# EAGLE board ControlSystem - v.1.0 (EAGLE 9.5.2)
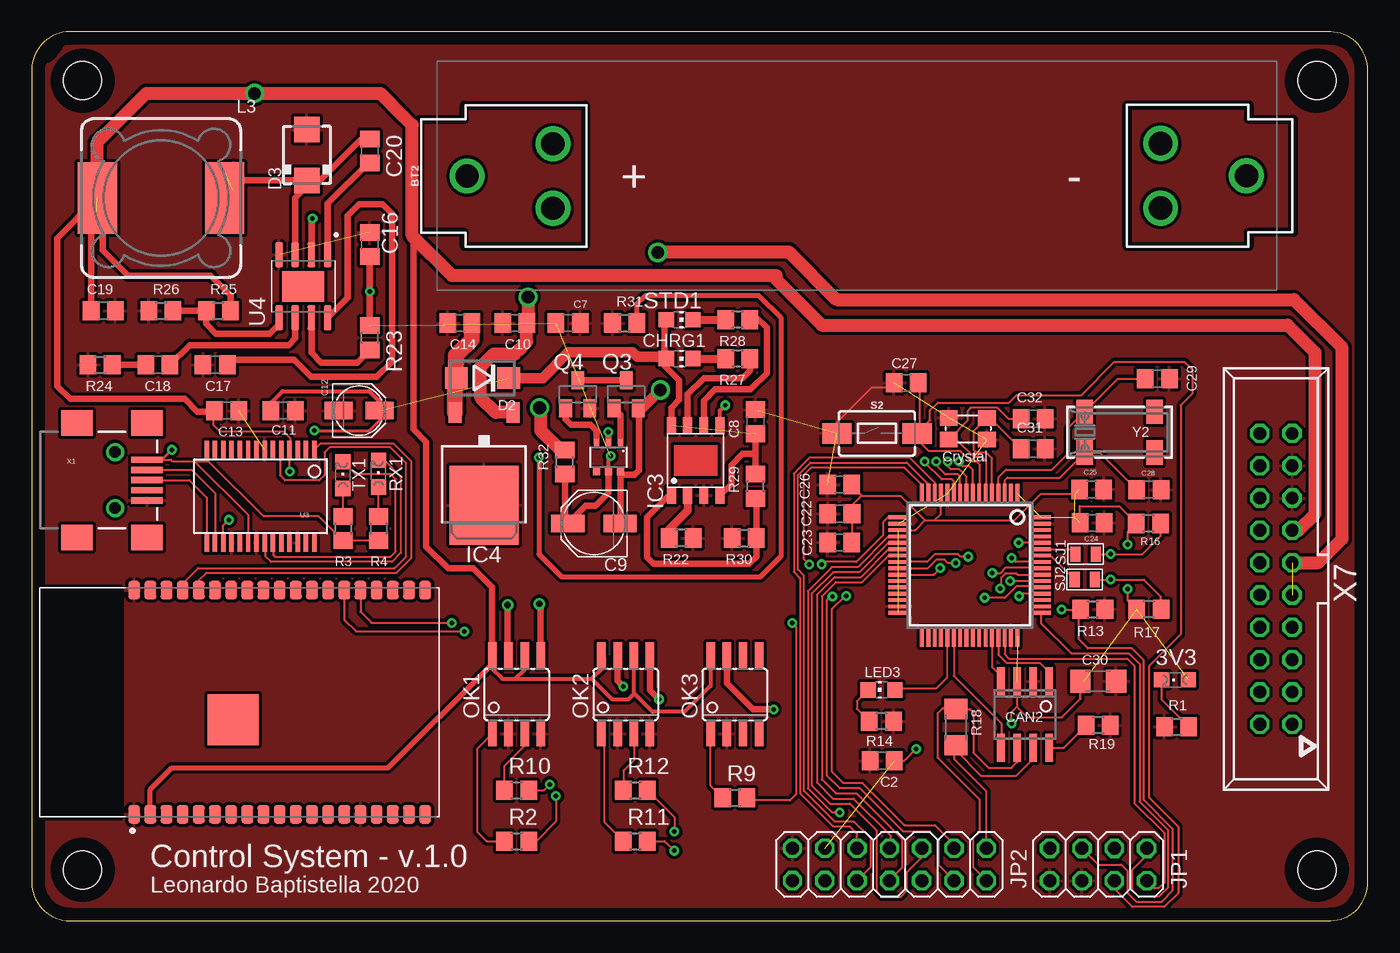
[diagram p0: board, top side]
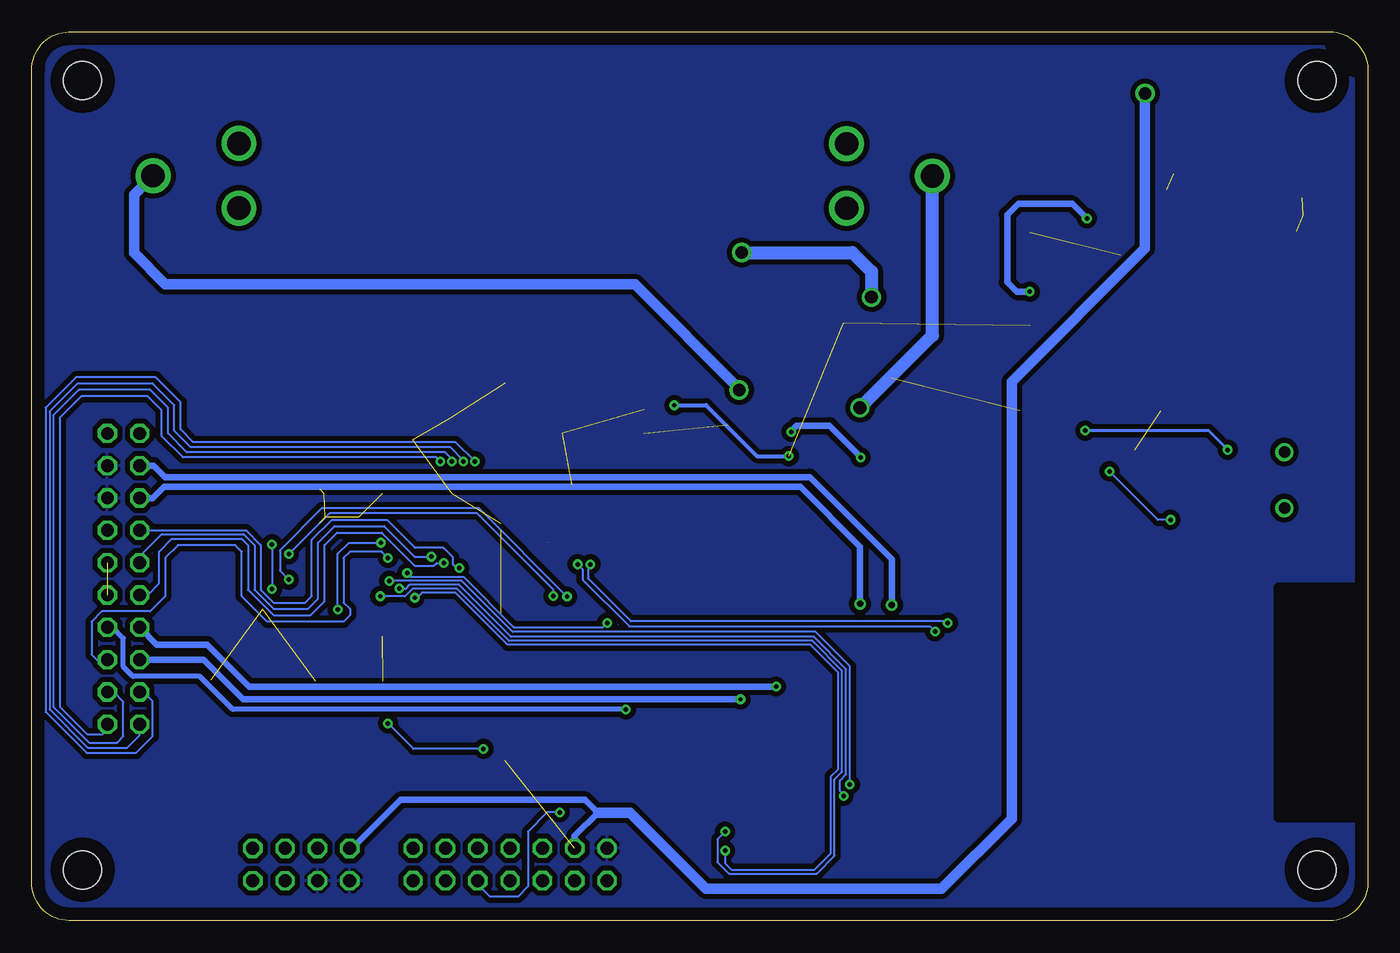
[diagram p1: board, bottom side, seen from below]

Size 105 x 69.84 mm. Coordinates in mm from the lower left corner, seen from the top.
Outline: 0,66.84 0,3 arc90 3,0 102.08,0 arc90 105,3 105,66.84 arc90 102.08,69.84 3,69.84 arc90 0,66.84
Copper layers (1*16): Top 0.035mm / dielectric 1.5mm / Bottom 0.035mm
Design rules "default": minimum track width 6mil, minimum drill 0.35mm, track to track 6mil, track to pad 6mil, pad to pad 6mil, via to via 6mil, smd to smd 6mil, copper to edge 40mil, drill to drill 6mil, minimum pad ring 10mil, minimum via ring 8mil, stop-mask expansion 4mil, vias tented up to drill 0mil, thermal gap 10mil
Net classes: 1 power: width 0.254 mm
Holes 3 mm at 4,66 101,66 4,4 101,4

## Footprints (pad centres in the part's own frame; a part is rotated, then mirrored left to right if it is on the bottom)
CHIPLED_0805 = smd 1.2 x 1.2: A 0,-1.05; C 0,1.05
XCVR_ESP32-WROVER-I = smd 1.45 x 0.93: 1 -8.81,8.26; 2 -8.81,6.99; 3 -8.81,5.72; 4 -8.81,4.45; 5 -8.81,3.18; 6 -8.81,1.91; 7 -8.81,0.64; 8 -8.81,-0.63; 9 -8.81,-1.9; 10 -8.81,-3.17; 11 -8.81,-4.44; 12 -8.81,-5.71; 13 -8.81,-6.98; 14 -8.81,-8.25; 15 -8.81,-9.52; 16 -8.81,-10.79; 17 -8.81,-12.06; 18 -8.81,-13.33; 19 -8.81,-14.6; 20 8.81,-14.6; 21 8.81,-13.33; 22 8.81,-12.06; 23 8.81,-10.79; 24 8.81,-9.52; 25 8.81,-8.25; 26 8.81,-6.98; 27 8.81,-5.71; 28 8.81,-4.44; 29 8.81,-3.17; 30 8.81,-1.9; 31 8.81,-0.63; 32 8.81,0.64; 33 8.81,1.91; 34 8.81,3.18; 35 8.81,4.45; 36 8.81,5.72; 37 8.81,6.99; 38 8.81,8.26 | smd 4 x 4: 39 -1.38,0.47
BATTERY_18650-HOLDER = drill 1.829: GND@1 30.628,0.01; GND@2 23.88,2.55; GND@3 23.88,-2.53; PWR@1 -30.628,-0.01; PWR@2 -23.88,2.53; PWR@3 -23.88,-2.55
C0805 = smd 1.3 x 1.5: 1 -0.95,0; 2 0.95,0
PANASONIC_C = smd 2.6 x 1.4: + 2.05,0; - -2.05,0
PANASONIC_B = smd 2.2 x 1.4: + 1.6,0; - -1.6,0
C1206 = smd 1.6 x 1.8: 1 -1.4,0; 2 1.4,0
SOIC8 = smd 0.6 x 2.2: 1 -1.905,-2.6; 2 -0.635,-2.6; 3 0.635,-2.6; 4 1.905,-2.6; 5 1.905,2.6; 6 0.635,2.6; 7 -0.635,2.6; 8 -1.905,2.6
CHIP-LED0805 = smd 1.2 x 1.2: A 0,-1.05; C 0,1.05
LQFP64_10X10 = smd 0.3 x 1.6: 1 -3.75,-5.6; 2 -3.25,-5.6; 3 -2.75,-5.6; 4 -2.25,-5.6; 5 -1.75,-5.6; 6 -1.25,-5.6; 7 -0.75,-5.6; 8 -0.25,-5.6; 9 0.25,-5.6; 10 0.75,-5.6; 11 1.25,-5.6; 12 1.75,-5.6; 13 2.25,-5.6; 14 2.75,-5.6; 15 3.25,-5.6; 16 3.75,-5.6; 33 3.75,5.6; 34 3.25,5.6; 35 2.75,5.6; 36 2.25,5.6; 37 1.75,5.6; 38 1.25,5.6; 39 0.75,5.6; 40 0.25,5.6; 41 -0.25,5.6; 42 -0.75,5.6; 43 -1.25,5.6; 44 -1.75,5.6; 45 -2.25,5.6; 46 -2.75,5.6; 47 -3.25,5.6; 48 -3.75,5.6 | smd 1.6 x 0.3: 17 5.6,-3.75; 18 5.6,-3.25; 19 5.6,-2.75; 20 5.6,-2.25; 21 5.6,-1.75; 22 5.6,-1.25; 23 5.6,-0.75; 24 5.6,-0.25; 25 5.6,0.25; 26 5.6,0.75; 27 5.6,1.25; 28 5.6,1.75; 29 5.6,2.25; 30 5.6,2.75; 31 5.6,3.25; 32 5.6,3.75; 49 -5.6,3.75; 50 -5.6,3.25; 51 -5.6,2.75; 52 -5.6,2.25; 53 -5.6,1.75; 54 -5.6,1.25; 55 -5.6,0.75; 56 -5.6,0.25; 57 -5.6,-0.25; 58 -5.6,-0.75; 59 -5.6,-1.25; 60 -5.6,-1.75; 61 -5.6,-2.25; 62 -5.6,-2.75; 63 -5.6,-3.25; 64 -5.6,-3.75
DO214BA = smd 1.8 x 1.7: A 2.05,0; C -2.05,0
SMA = smd 2 x 2: A 2,0; C -2,0
SOP-8 = smd 1.3 x 0.7: 1 -2.75,1.905; 2 -2.75,0.635; 3 -2.75,-0.635; 4 -2.75,-1.905; 5 2.75,-1.905; 6 2.75,-0.635; 7 2.75,0.635; 8 2.75,1.905
TO252 = smd 1 x 1.6: 1 -2.28,-4.8; 2 2.28,-4.8 | smd 5.4 x 6.2: 3 0,2.5
2X04 = drill 1.016 octagon: 1 -3.81,-1.27; 2 -3.81,1.27; 3 -1.27,-1.27; 4 -1.27,1.27; 5 1.27,-1.27; 6 1.27,1.27; 7 3.81,-1.27; 8 3.81,1.27
2X07 = drill 1.016 octagon: 1 -7.62,-1.27; 2 -7.62,1.27; 3 -5.08,-1.27; 4 -5.08,1.27; 5 -2.54,-1.27; 6 -2.54,1.27; 7 0,-1.27; 8 0,1.27; 9 2.54,-1.27; 10 2.54,1.27; 11 5.08,-1.27; 12 5.08,1.27; 13 7.62,-1.27; 14 7.62,1.27
SRR1280 = smd 5.6 x 3.1: 1 0.635,5; 2 0.635,-5
SOIC08 = smd 0.66 x 2.032: 1 -1.905,-3.073; 2 -0.635,-3.073; 3 0.635,-3.073; 4 1.905,-3.073; 5 1.905,3.073; 6 0.635,3.073; 7 -0.635,3.073; 8 -1.905,3.073
SOT23 = smd 1 x 1.4: 1 -0.95,-1.1; 2 0.95,-1.1; 3 0,1.1
R0805 = smd 1.3 x 1.5: 1 -0.95,0; 2 0.95,0
R1206 = smd 1.6 x 1.803: 1 -1.422,0; 2 1.422,0
TACTILE_SWITCH_SMD_6.0X3.5MM = smd 2.3 x 1.6: 1 -3.15,0; 2 3.15,0
SMD-JUMPER-2 = smd 0.8 x 1.2: 1 -0.8,0; 2 0.8,0
SSOP28DB = smd 0.348 x 1.397: 1 -4.225,-3.656; 2 -3.575,-3.656; 3 -2.925,-3.656; 4 -2.275,-3.656; 5 -1.625,-3.656; 6 -0.975,-3.656; 7 -0.325,-3.656; 8 0.325,-3.656; 9 0.975,-3.656; 10 1.625,-3.656; 11 2.275,-3.656; 12 2.925,-3.656; 13 3.575,-3.656; 14 4.225,-3.656; 15 4.225,3.656; 16 3.575,3.656; 17 2.925,3.656; 18 2.275,3.656; 19 1.625,3.656; 20 0.975,3.656; 21 0.325,3.656; 22 -0.325,3.656; 23 -0.975,3.656; 24 -1.625,3.656; 25 -2.275,3.656; 26 -2.925,3.656; 27 -3.575,3.656; 28 -4.225,3.656
SOIC127P600X170-9N = smd 1.97 x 0.6: 1 -2.475,1.905; 2 -2.475,0.635; 3 -2.475,-0.635; 4 -2.475,-1.905; 5 2.475,-1.905; 6 2.475,-0.635; 7 2.475,0.635; 8 2.475,1.905 | smd 2.41 x 3.3: 9 0,0
CRYSTAL_SMD = smd 1.4 x 1.2: P$1 0,1.7; P$2 3,1.7; P$3 0,0; P$4 3,0
SOT23-6 = smd 0.4 x 0.55: 1 -0.95,-1.15; 2 0,-1.15; 3 0.95,-1.15 | smd 0.55 x 0.55: 4 0.95,1.15; 5 0,1.15; 6 -0.95,1.15
USB-MINIB-NOSTOP = smd 2.5 x 0.5: D+ 2.5,0; D- 2.5,0.8; GND 2.5,-1.6; ID 2.5,-0.8; VBUS 2.5,1.6 | smd 2.5 x 2: G1 -3,-4.5; G2 -3,4.5; G3 2.5,4.5; G4 2.5,-4.5 | drill 0.9 pad 0.8: H1 0,2.2 | drill 0.9 pad 0.787: H2 0,-2.2
057-020-1 = drill 1 octagon: 1 -11.43,-1.27; 2 -11.43,1.27; 3 -8.89,-1.27; 4 -8.89,1.27; 5 -6.35,-1.27; 6 -6.35,1.27; 7 -3.81,-1.27; 8 -3.81,1.27; 9 -1.27,-1.27; 10 -1.27,1.27; 11 1.27,-1.27; 12 1.27,1.27; 13 3.81,-1.27; 14 3.81,1.27; 15 6.35,-1.27; 16 6.35,1.27; 17 8.89,-1.27; 18 8.89,1.27; 19 11.43,-1.27; 20 11.43,1.27
CRYSTAL_8X3.8 = smd 1.3 x 1.9: P$1 -2.75,-1.6; P$2 2.75,-1.6; P$3 2.75,1.6; P$4 -2.75,1.6

## Placement (x,y rotation side)
3V3  [CHIPLED_0805]  89.85,18.92 90 top
A1  ESP32-WROVER-I  [XCVR_ESP32-WROVER-I]  16.31,17.17 90 top
BT2  [BATTERY_18650-HOLDER]  64.84,58.52 0 top
C2  [C0805]  66.83,12.57 180 top
C7  10uf  [C0805]  42.15,46.96 0 top
C8  10uF  [C0805]  56.88,39.21 90 top
C9  0.1uF  [PANASONIC_C]  44.18,31.21 180 top
C10  10uF  [C0805]  37.96,46.96 180 top
C11  0.1uF  [C0805]  19.76,40.08 0 top
C12  10uF  [PANASONIC_B]  25.73,40.08 0 top
C13  0.1uF  [C0805]  15.31,40.08 0 top
C14  10uF  [C0805]  33.64,46.96 180 top
C16  10uF  [C0805]  26.57,53.14 90 top
C17  0.1uF  [C0805]  14.41,43.68 180 top
C18  3.9nF  [C0805]  9.9,43.68 180 top
C19  22uF  [C0805]  5.62,47.93 0 top
C20  10nF  [C0805]  26.57,60.48 270 top
C22  [C0805]  63.51,31.98 180 top
C23  [C0805]  63.51,29.72 180 top
C24  [C0805]  83.34,31.25 0 top
C25  [C0805]  83.3,33.88 0 top
C26  [C0805]  63.5,34.27 180 top
C27  [C0805]  68.72,42.25 0 top
C28  [C0805]  87.8,33.88 180 top
C29  [C0805]  88.47,42.58 180 top
C30  1nF  [C1206]  83.82,18.82 0 top
C31  [C0805]  78.69,37.07 0 top
C32  [C0805]  78.69,39.45 0 top
CAN2  SN65HVD233D  [SOIC8]  78.07,16.2 180 top
CHRG1  [CHIP-LED0805]  50.91,44.16 270 top
COMM_MICRO1  STM32L496RGT6  [LQFP64_10X10]  73.72,27.94 180 top
D2  [DO214BA]  35.42,42.64 180 top
D3  B130-13-F  [SMA]  21.62,60.16 90 top
IC3  TP4056  [SOP-8]  52.18,36.16 90 top
IC4  7806DT  [TO252]  35.54,35.13 180 top
JP1  [2X04]  83.82,4.41 180 top
JP2  [2X07]  67.41,4.42 180 top
L3  SRR1280  [SRR1280]  10.16,57.42 270 top
LED3  [CHIP-LED0805]  66.79,18.13 90 top
OK1  ILD205  [SOIC08]  38.1,17.78 0 top
OK2  ILD205  [SOIC08]  46.68,17.78 0 top
OK3  ILD205  [SOIC08]  55.26,17.78 0 top
Q3  SSM3K329R  [SOT23]  46.72,41.37 0 top
Q4  SSM3K329R  [SOT23]  42.91,41.37 0 top
R1  220  [R0805]  89.98,15.24 0 top
R2  1K  [R0805]  38.1,6.25 0 top
R3  1K  [R0805]  24.46,30.81 270 top
R4  1K  [R0805]  27.25,30.81 270 top
R9  1K  [R0805]  55.26,9.66 0 top
R10  1K  [R0805]  38.1,10.26 0 top
R11  1K  [R0805]  47.44,6.25 0 top
R12  1K  [R0805]  47.44,10.26 0 top
R13  [R0805]  83.39,24.46 0 top
R14  [R0805]  66.78,15.66 180 top
R16  [R0805]  87.75,31.21 180 top
R17  [R0805]  87.8,24.46 180 top
R18  120  [R1206]  72.62,15.21 90 top
R19  100  [R0805]  83.82,15.35 180 top
R22  [R0805]  51.04,30.07 180 top
R23  100K  [R0805]  26.57,45.8 90 top
R24  6.8K  [R0805]  5.37,43.68 0 top
R25  26.1K  [R0805]  14.66,47.93 0 top
R26  10K  [R0805]  10.15,47.93 0 top
R27  1k  [R0805]  55.48,44.16 180 top
R28  1k  [R0805]  55.48,47.21 180 top
R29  [R0805]  56.88,34.13 90 top
R30  [R0805]  55.99,30.07 0 top
R31  1k  [R0805]  46.59,46.96 0 top
R32  100  [R0805]  41.89,36.04 90 top
RX1  Green  [CHIPLED_0805]  27.25,35.13 0 top
S2  MOMENTARY-SWITCH-SPST-SMD-6.0X3.5MM  [TACTILE_SWITCH_SMD_6.0X3.5MM]  66.43,38.29 0 top
SJ1  [SMD-JUMPER-2]  82.83,28.8 0 top
SJ2  [SMD-JUMPER-2]  82.76,26.8 0 top
STD1  [CHIP-LED0805]  50.91,47.21 270 top
TX1  Red  [CHIPLED_0805]  24.46,35 0 top
U3  FT232RLSSOP  [SSOP28DB]  17.98,33.35 180 top
U4  MP2307DN-LF-Z  [SOIC127P600X170-9N]  21.34,49.84 270 top
U$2  CRYSTAL  [CRYSTAL_SMD]  72.07,37.8 0 top
U$3  DW01  [SOT23-6]  45.32,36.42 180 top
X1  USB-SMD-NS  [USB-MINIB-NOSTOP]  6.55,34.62 0 top
X7  057-020-1  [057-020-1]  97.79,26.86 90 top
Y2  [CRYSTAL_8X3.8]  85.5,38.38 0 top

## Library data of the parts
3V3 CHRG1 LED3 RX1 STD1 TX1 = led
A1 = ESP32-WROVER-I; AVAILABILITY: Unavailable; DESCRIPTION: Bluetooth, WiFi 802.11b/g/n, Bluetooth v4.2 +EDR, Class 1, 2 and 3 Transceiver Module 2.4GHz ~ 2.5GHz Antenna Not Included, I-PEX Surface Mount; MF: Espressif Systems; MP: ESP32-WROVER-I; PACKAGE: Module Espressif Systems; PRICE: None
BT2 = SparkFun-Batteries; PROD_ID: BATT-12327; SF_SKU: PRT-13113
C2 C7-C14 C16-C20 C22-C32 = rcl; SPICEPREFIX: C
CAN2 = SN65HVD233D; AVAILABILITY: Unavailable; DESCRIPTION: 3.3V CAN Transceiver with Standby Mode, Loop-back 8-SOIC -40 to 125; MF: Texas Instruments; MP: SN65HVD233D; PACKAGE: SOIC-8 Texas Instruments; PRICE: None
COMM_MICRO1 = STM32L4xxx; FARNELL: 2725138; FLASH: 1024kB; SRAM: 320kB
D2 = diode
D3 = B130-13-F; AVAILABILITY: Unavailable; DESCRIPTION: Diode Schottky 30V 1A Surface Mount SMA; MF: Multicomp; MP: B130-13-F; PACKAGE: DO-214 Multicomp; PRICE: None
IC3 = TP4056
IC4 = linear
JP1 JP2 = pinhead
L3 = inductor-bourns
OK1-OK3 = optocoupler; MF: VISHAY/TELEFUNKEN; MPN: ILD205T; OC_FARNELL: 1469512; OC_NEWARK: 20H8678
Q3 Q4 = SSM3K329R; AVAILABILITY: Unavailable; DESCRIPTION: N-Channel 60V 115mA (Tc) 225mW (Ta) Surface Mount SOT-23-3 (TO-236); MF: STMicroelectronics; MP: 2N7002; PACKAGE: SOT-23-3 Vishay; PRICE: None
R1-R4 R9-R14 R16-R19 R22-R32 = rcl; SPICEPREFIX: R
S2 = SparkFun-Switches; PROD_ID: SWCH-00815; SF_SKU: COM-08229
SJ1 SJ2 = FaBo-PIN
U3 X1 = SparkFun
U4 = MP2307DN-LF-Z; AVAILABILITY: Unavailable; DESCRIPTION: Buck Switching Regulator IC Positive Adjustable 0.925V 1 Output 3A 8-SOIC _0.154, 3.90mm Width_ Exposed Pad; MF: Monolithic Power; MP: MP2307DN-LF-Z; PACKAGE: SOIC-8 Monolithic Power; PRICE: None
U$2 = cristal
U$3 = DW01
X7 = con-panduit; OC_FARNELL: unknown; OC_NEWARK: unknown
Y2 = microbuilder

## Nets
+3V3: 3V3.A A1.2 C2.1 C13.1 C19.1 C22.1 C23.1 C24.1 C25.1 C26.1 C30.1 CAN2.3 COMM_MICRO1.1 COMM_MICRO1.13 COMM_MICRO1.19 COMM_MICRO1.32 COMM_MICRO1.48 COMM_MICRO1.64 JP1.7 JP2.11 L3.2 OK1.6 OK1.8 OK2.6 OK2.8 OK3.8 R16.2 R17.2 R25.2 U3.4 U3.17 X7.13
+5V: C8.1 C11.1 C12.+ CHRG1.A D2.C IC3.4 IC3.8 R3.2 R4.2 R29.2 STD1.A U3.20 X1.VBUS
+12V: C10.1 IC4.1 X7.9 X7.11
BAT+: C7.1 C9.+ C16.1 IC3.5 R23.2 R32.1 U4.2 U$3.5
BOOT: COMM_MICRO1.60 JP1.5 R13.1
CAN1_LBK: CAN2.5 COMM_MICRO1.38
CAN1_RX: CAN2.4 COMM_MICRO1.44
CAN1_TX: CAN2.1 COMM_MICRO1.45
CAN_H: CAN2.7 JP2.1 R18.1
CAN_L: CAN2.6 JP2.2 R18.2
CTS: U3.11
DIG4: COMM_MICRO1.51
DIG5: COMM_MICRO1.50
DIO0_COMM_RX: COMM_MICRO1.35
DIO0_COMM_TX: COMM_MICRO1.42
DTR: U3.2
EP: U4.9
EXP: A1.39
GND: A1.1 A1.15 A1.38 C2.2 C7.2 C8.2 C10.2 C11.2 C12.- C13.2 C14.2 C16.2 C17.2 C19.2 C22.2 C23.2 C24.2 C25.2 C26.2 C27.1 C28.1 C29.1 C30.2 C31.2 C32.2 CAN2.2 COMM_MICRO1.12 COMM_MICRO1.18 COMM_MICRO1.31 COMM_MICRO1.47 COMM_MICRO1.63 D3.A IC3.3 IC4.3 JP1.6 JP1.8 JP2.13 OK1.2 OK1.4 OK2.2 OK2.4 OK3.2 Q4.2 R1.1 R13.2 R14.1 R19.1 R22.1 R24.1 R26.1 R30.1 R31.1 S2.1 U3.7 U3.18 U3.21 U3.25 U3.26 U4.4 U$2.P$1 U$2.P$4 X1.GND X7.15 X7.17
LED_CHARGER: COMM_MICRO1.57 X7.5
LOAD_CONTROL: OK3.7 X7.7
LOAD_CURRENT: COMM_MICRO1.24 X7.12
M_LOAD_CONTROL: COMM_MICRO1.56 R9.2
M_RELAY_1: COMM_MICRO1.55 R2.2
M_RELAY_2: COMM_MICRO1.54 R10.2
M_RELAY_3: COMM_MICRO1.53 R11.2
M_RELAY_4: COMM_MICRO1.52 R12.2
MISO_BUS: COMM_MICRO1.22 JP2.7
MOSI_BUS: COMM_MICRO1.23 JP2.8
N$1: 3V3.C R1.2
N$2: JP2.14
N$3: R3.1 TX1.A
N$4: R4.1 RX1.A
N$5: JP2.12
N$6: OK1.1 R2.1
N$7: OK3.1 R9.1
N$15: OK1.3 R10.1
N$16: OK2.1 R11.1
N$17: OK2.3 R12.1
N$20: COMM_MICRO1.37 LED3.A
N$21: LED3.C R14.2
N$22: C28.2 COMM_MICRO1.3 Y2.P$1
N$23: C29.2 COMM_MICRO1.4 Y2.P$4
N$24: COMM_MICRO1.59 SJ1.1
N$25: COMM_MICRO1.58 SJ2.1
N$26: CAN2.8 R19.2
N$31: IC3.2 R22.2
N$32: R23.1 U4.7
N$33: C18.2 R24.2
N$34: C17.1 U4.8
N$35: C18.1 U4.6
N$36: C20.1 D3.C L3.1 U4.3
N$37: R25.1 R26.2 U4.5
N$38: C20.2 U4.1
N$39: IC3.7 R27.1
N$40: IC3.6 R28.1
N$41: CHRG1.C R27.2
N$42: R28.2 STD1.C
N$43: IC3.1 R29.1 R30.2
N$44: R31.2 U$3.2
N$45: Q3.1 U$3.1
N$46: Q3.3 Q4.3
N$47: Q4.1 U$3.3
N$48: BT2.PWR@1 R32.2
N$49: BT2.GND@1 C9.- Q3.2 U$3.6
N$50: C14.1 D2.A IC4.2
NRST: C27.2 COMM_MICRO1.7 JP1.4 S2.2
NSS_BUS: COMM_MICRO1.20 JP2.6
OSC_IN: C31.1 COMM_MICRO1.5 U$2.P$2
OSC_OUT: C32.1 COMM_MICRO1.6 U$2.P$3
RELAY_1: OK1.7 X7.18
RELAY_2: OK1.5 X7.16
RELAY_3: OK2.7 X7.8
RELAY_4: OK2.5 X7.6
RESET_COMM_RX: COMM_MICRO1.33
RESET_COMM_TX: COMM_MICRO1.40
RXDO: A1.34 U3.1
RXLED: RX1.C U3.22
SCL_BUS: JP2.4 R17.1 SJ2.2
SCLK_BUS: COMM_MICRO1.21 JP2.5
SCLK_COMM: COMM_MICRO1.29
SDA_BUS: JP2.3 R16.1 SJ1.2
SS_COMMRX: COMM_MICRO1.34
SS_COMMTX: COMM_MICRO1.41
SWCLK: COMM_MICRO1.49 JP1.1
SWDIO: COMM_MICRO1.46 JP1.2
SWO: JP1.3
TEMP_LOAD: COMM_MICRO1.25 X7.10
TEMP_P1: COMM_MICRO1.8 X7.1
TEMP_P2: COMM_MICRO1.9 X7.3
TXDO: A1.35 U3.5
TXLED: TX1.C U3.23
UART_RX: A1.25 COMM_MICRO1.17
UART_RX_BUS: COMM_MICRO1.15 JP2.10
UART_TX: A1.24 COMM_MICRO1.16
UART_TX_BUS: COMM_MICRO1.14 JP2.9
UPS_CURRENT: COMM_MICRO1.10 X7.2
USB_D+1: U3.15 X1.D+
USB_D-1: U3.16 X1.D-
V_LOAD: COMM_MICRO1.26 X7.14
V_UPS: COMM_MICRO1.11 X7.4

## Tracks (layer width: path | path; a pad name or v marks a point on that pad's centre or on a via)
+3V3  (via drill 0.35, 1)  (13 unrouted)
  Top 0.152: 82.69,18.82 C30.1 82.42,17.42 80.97,15.97 78.27,15.97 77.44,16.8 | CAN2.3 77.44,16.8 | v86.12,29.57 86.12,30.52 R16.2 86.82,31.23 85.47,32.57 82.35,32.57 82.35,31.3 81.96,31.69 | v86.12,26.07 86.12,25.19 R17.2 | 64.69,29.95 C23.1 | 82.01,33.54 79.32,33.54 77.22,31.45 70.94,31.45 | 65.19,33.38 68.26,33.38 70.19,31.45 | 70.19,31.45 70.94,31.45 | 70.94,31.45 71.44,31.94 71.44,33.52 COMM_MICRO1.13 | C23.1 C22.1 64.46,32.65 65.19,33.38 | 65.19,33.38 65.19,33.42 64.45,34.17 C26.1 | 14.28,40 14.28,38.92 14.8,38.4 19.81,38.4 20.31,37.9 20.31,37.06 U3.4 20.25,35.34 v20.3,35.3 | COMM_MICRO1.19 69.44,30.69 70.19,31.45 | U3.17 15.05,31.05 v15.5,31.5 | C2.1 68.57,12.57 v69.5,13.5 | v77,15.5 77,16.37 77.44,16.8 | 30,62.5 29.3,63.2 29.2,63.2 | 29.91,62.5 27.41,65
  Top 0.305: OK1.8 36.2,19.8 | 36,20 36.2,19.8 | 36.2,19.8 37,19 38,19 | 38,19 38.73,19.73 OK1.6 | 38,19 44,19 | 44,19 45,20 45,20.63 OK2.8 | 47.31,17.89 47.31,17.82 46.9,17.4 45.6,17.4 44,19 | 47.31,17.89 OK2.6 | OK3.8 53.35,18.45 51.3,16.4 48.8,16.4 47.31,17.89
  Top 0.406: 36,20 28,12 11,12 9.32,10.32 A1.2
  Top 0.508: C19.1 4.67,55.03 5.07,55.43 | R25.2 15.62,49.13 14.07,50.68 7.57,50.68 5.57,52.68 5.57,54.18 | L3.2 2,53.62 2,42 3,41 12,41 13,40 14.28,40 C13.1 | 30,62.5 30,38.6 31,37.6 31,29.4 32.7,27.7 34.7,27.7 36.2,26.2 OK1.8
  Top 1.016: X7.13 99.56,30.67 100.88,31.99 100.88,44.62 98.7,46.8 62.1,46.8 58.5,50.4 58.5,50.7 33.03,50.7 29.91,53.82 29.91,62.5 29.2,63.2 27.41,65 v17.5,65 9,65 5.16,61.16 L3.2
  Bottom 0.152: v86.12,29.57 v86.12,26.07 | v15.5,31.5 16.5,31.5 v20.3,35.3 | v69.5,13.5 75,13.5 v77,15.5
  Bottom 0.508: JP2.11 62.33,6.67 60.5,8.5 61.5,9.5 76,9.5 79.82,5.68 JP1.7
  Bottom 0.813: v17.5,65 17.5,52.82 27.98,42.33 27.98,8.02 33.5,2.5 52,2.5 58,8.5 60.5,8.5
+5V  (via drill 0.35)  (2 unrouted)
  Top 0.152: X1.VBUS 10.95,36.22 11.09,36.08 12.81,36.08 | 12.81,36.08 17,31.89 U3.20 | 12.81,36.08 13.92,36.08 18.24,31.76 22.56,31.76 R3.2 R4.2
  Top 0.254: X1.VBUS 10.22,36.22 v11,37 | v22.2,38.51 26.51,38.51 28,40 27.92,40.08 C12.+
  Top 0.305: C11.1 18.81,40.71 19.7,41.6 26.5,41.6 27.33,40.77 C12.+
  Top 0.508: R29.2 56.88,36.67 | 56.88,36.67 C8.1 | IC3.4 54.98,34.3 54.98,35.78 55.86,36.67 56.88,36.67 | IC3.8 50.28,40.31 50.88,40.91 50.88,42.46 49.77,43.57 49.77,44.07 CHRG1.A 49.73,44.29 49.73,47.09 STD1.A
  Top 0.813: D2.C 40.13,42.64 42.17,44.67 47.23,44.67 47.61,44.29 49.73,44.29
  Bottom 0.254: v11,37 12.51,38.51 v22.2,38.51
+12V  (via drill 1)  (1 unrouted)
  Top 0.508: C10.1 38.91,46.71 | 37.73,39.93 IC4.1 | 36.31,44.55 36.56,44.55 | 37.96,44.55 38.21,44.8 | 38.85,45.43 38.91,45.49
  Top 1.016: IC4.1 36.46,39.93 35.29,41.1 35.29,43.53 36.31,44.55 | 36.56,44.55 37.96,44.55 | 38.91,45.49 C10.1 39,47.05 v39,49 | 38.21,44.8 38.85,45.43 | X7.11 101.13,28.13 103,30 103,45 99.2,48.8 63.25,48.8 59.5,52.55 49.25,52.55 v49.2,52.5
  Bottom 1.016: v49.2,52.5 40.5,52.5 39,51 v39,49
BAT+  (via drill 0.35)  (2 unrouted)
  Top 0.305: IC3.5 54.09,40.09 v54.5,40.5 | U$3.5 45.32,36.32 v45.5,36.5
  Top 0.508: R32.1 41.89,31.45 C9.+ 43.53,32.61 44.31,32.61 45.32,33.62 U$3.5 | R23.2 v26.57,49.43 C16.1 | U4.2 21.98,55.09 v22.07,55.18
  Bottom 0.305: v54.5,40.5 52,40.5 48,36.5 v45.5,36.5
  Bottom 0.508: v22.07,55.18 23.22,56.33 27.47,56.33 28.32,55.48 28.32,50.18 27.57,49.43 v26.57,49.43
BOOT  (via drill 0.35)
  Top 0.152: COMM_MICRO1.60 v77.58,29.69 v77.57,29.7 | v80.94,24.45 82.3,24.45 | 82.3,24.45 82.42,24.45 R13.1 | JP1.5 83.83,4.4 85.63,4.4 86.09,3.94 86.09,2.21 86.8,1.5 88.8,1.5 89.7,2.4 89.7,7.2 87.4,9.5 87.4,20.46 86.46,21.4 83,21.4 82.3,22.1 82.3,24.45
  Bottom 0.152: v80.94,24.45 80.94,28.82 80.07,29.7 v77.57,29.7
CAN1_LBK
  Top 0.152: CAN2.5 76.19,13.62 76.19,15.51 72.47,19.23 COMM_MICRO1.38
CAN1_RX
  Top 0.152: 75.47,21.54 COMM_MICRO1.44 | 75.47,21.55 COMM_MICRO1.44 | CAN2.4 76.17,19.25 75.47,19.95 COMM_MICRO1.44
CAN1_TX
  Top 0.152: CAN2.1 79.97,19.53 79.26,20.24 76.64,20.24 75.97,20.91 COMM_MICRO1.45
CAN_H
  Top 0.152: 72.62,13.5 R18.1 72.4,14 | 72.62,13.5 72.62,13.38 74.6,11.4 77.4,11.4 78.7,12.71 CAN2.7 | JP2.1 75.03,10.17 72.5,12.7 72.5,13.38 72.62,13.5
CAN_L
  Top 0.152: CAN2.6 77.44,12.44 77,12 75.2,12 74,13.2 74,16.4 73.77,16.63 R18.2 72.55,16.7 71.6,16.7 71.2,16.3 71.2,12.8 74.5,9.5 74.5,7 74,6.5 74,4.18 JP2.2
GND  (8 unrouted)
  Top 0.152: S2.1 63.28,39.15 66.04,41.91 67.43,41.91 C27.1
  pour Top (isolate 0.254): 2.8,69.8 arc-90 3,70 102.5,70 arc-90 105,67.5 105,64.5 105,4 arc-90 101,0 96,0 4.5,0 arc-90 0,4.5 0,10.5 0,67 arc90
  pour Bottom (isolate 0.406): 3.5,70 102,70 arc-90 105,67 105,61.5 105,3.5 arc-90 101.5,0 95.5,0 4,0 arc-90 0,4 0,11 0,66 arc90 3.5,69.5
LED_CHARGER  (via drill 0.35)
  Top 0.152: COMM_MICRO1.57 77.31,28.19 v77,28.5
  Bottom 0.152: v77,28.5 77.5,29 80,29 80.5,28.5 80.5,25 80,24.5 80,24 80.5,23.5 86.5,23.5 88.5,25.5 88.5,29 89,29.5 93.5,29.5 94.5,28.5 94.5,25.5 95.7,24.3 99.5,24.3 100.3,23.5 100.3,20.9 99.91,20.51 X7.5
LOAD_CONTROL  (via drill 0.35)
  Top 0.508: OK3.7 54.62,18.68 56.7,16.6 v58.3,16.6
  Bottom 0.406: v58.3,16.6 89.2,16.6 91.8,19.2 97.05,19.2 97.8,19.95 97.8,22.2 98.65,23.05
  Bottom 0.508: 98.65,23.05 X7.7
LOAD_CURRENT  (via drill 0.35)
  Top 0.152: v73.6,28.6 73,28.6 72.8,28.8 71,28.8 70.39,28.19 COMM_MICRO1.24
  Bottom 0.152: X7.12 96.52,28.63 94.78,30.36 88.36,30.36 87.5,29.5 87.5,26 86,24.5 83.29,24.5 82.5,25.29 82.5,29.71 81.21,31 77.29,31 74.89,28.6 v73.6,28.6
M_LOAD_CONTROL  (via drill 0.35)
  Top 0.152: R9.2 56.41,9.46 59.61,9.46 60.08,9.93 60.08,23.1 v59.78,23.4 | v75.5,27.31 76.12,27.31 76.52,27.71 79.29,27.71 COMM_MICRO1.56
  Bottom 0.152: v59.78,23.4 60.12,23.06 67.12,23.06 71.06,27.01 75.2,27.01 v75.5,27.31
M_RELAY_1  (via drill 0.35)
  Top 0.152: v41.2,9.8 41.2,7.8 39.66,6.25 R2.2 | COMM_MICRO1.55 77.47,27.19 77.35,27.31 76.55,27.31 76.2,26.96 76.2,26.09 v76.1,26.09
  Bottom 0.152: v41.2,9.8 41.15,9.85 41.5,10.2 41.5,11 41.01,11.49 41.01,19.77 43.53,22.3 67.33,22.3 71.42,26.38 75.31,26.38 75.6,26.09 v76.1,26.09
M_RELAY_2  (via drill 0.35)
  Top 0.152: R10.2 40.26,10.26 v40.7,10.7 | v76.9,26.7 COMM_MICRO1.54
  Bottom 0.152: v40.7,10.7 40.7,20 43.4,22.7 67.2,22.7 71.2,26.7 v76.9,26.7
M_RELAY_3  (via drill 0.35)
  Top 0.152: R11.2 49.74,6.25 v50.5,5.5 | v74.9,25.37 76.47,25.37 77.39,26.29 79.22,26.29 COMM_MICRO1.53
  Bottom 0.152: v50.5,5.5 50.5,4.5 50,4 43.5,4 42.2,5.3 42.2,11.33 41.61,11.92 41.61,19.5 43.8,21.69 67.62,21.69 71.71,25.77 74.33,25.77 74.73,25.37 v74.9,25.37
M_RELAY_4  (via drill 0.35)
  Top 0.152: R12.2 50.5,8.14 v50.5,7 | COMM_MICRO1.52 77.81,25.69 v77.61,25.49
  Bottom 0.152: v50.5,7 51.11,6.39 51.11,4.61 50.2,3.69 43.3,3.69 41.9,5.11 41.9,11.11 41.31,11.69 41.31,19.65 43.66,22 67.5,22 71.58,26.08 75.08,26.08 75.68,25.49 77.51,25.49 v77.61,25.49
MISO_BUS
  Top 0.152: JP2.7 67.5,5.78 67.5,6.7 64.6,9.6 62.97,9.6 61.7,10.87 61.7,25.6 63.1,27 65.15,27 67.34,29.19 COMM_MICRO1.22
MOSI_BUS
  Top 0.152: JP2.8 68.4,4.14 68.4,6.43 64.83,10.01 63.2,10.01 62.1,11.1 62.1,25.5 63.2,26.6 65.25,26.6 67.34,28.69 COMM_MICRO1.23
N$1
  Top 0.152: R1.2 88.8,17.37 3V3.C
N$3
  Top 0.152: R3.1 TX1.A
N$4
  Top 0.152: R4.1 RX1.A
N$6
  Top 0.152: OK1.1 35,13.51 35,7 35.74,6.25 R2.1
N$7
  Top 0.152: R9.1 53.35,10.62 OK3.1
N$15
  Top 0.152: R10.1 37.15,12.16 38.73,13.74 OK1.3
N$16
  Top 0.152: R11.1 45,7.75 45,14.48 OK2.1
N$17
  Top 0.152: OK2.3 47.31,12.62 46.5,11.8 R12.1
N$20
  Top 0.152: 68.15,18.44 LED3.A 67.94,18.23 71.08,18.23 71.97,19.12 COMM_MICRO1.37
N$21
  Top 0.152: LED3.C 64.86,17.25 64.86,16.64 R14.2
N$22
  Top 0.152: 76.47,34.31 COMM_MICRO1.3 76.47,34.59 76.69,34.82 80.79,34.82 Y2.P$1 83.94,36.78 C28.2
N$23
  Top 0.152: 75.97,34.31 COMM_MICRO1.4 75.97,34.84 76.57,35.45 80.19,35.45 81.44,36.7 81.44,38.67 Y2.P$4 85.35,42.58 C29.2
N$24
  Top 0.152: SJ1.1 81.64,29.19 COMM_MICRO1.59
N$25
  Top 0.152: SJ2.1 81.96,26.82 80.09,28.69 COMM_MICRO1.58
N$26
  Top 0.152: CAN2.8 81.12,13.6 R19.2
N$31
  Top 0.61: IC3.2 51.55,32.23 50.09,30.77 R22.2
N$32
  Top 0.508: R23.1 25.57,43.85 22.75,43.85 21.98,44.62 U4.7
N$33
  Top 0.508: R24.2 C18.2
N$34
  Top 0.508: C17.1 15.77,44.08 20.62,44.08 21.97,42.73 27.12,42.73 28.32,43.93 28.32,55.53 27.57,56.28 25.72,56.28 24.82,55.38 24.82,48.94 U4.8
N$35
  Top 0.508: 20.72,47.35 U4.6 20.7,45.75 20.19,45.23 12.4,45.23 C18.1
N$36  (1 unrouted)
  Top 0.508: 15.79,57.42 L3.1 15.16,57.34 14.57,57.93 14.8,58.16 D3.C | C20.1 26.47,61.33 25.82,61.33 22.65,58.16 D3.C | D3.C 21.62,57.73 20.7,56.81 U4.3
  Top 0.61: 15.24,58.69 15.88,59.33
N$37
  Top 0.508: R26.2 R25.1 13.71,46.88 14.47,46.13 18.7,46.13 19.43,46.87 U4.5 19.43,48.06
N$38
  Top 0.508: U4.1 23.25,56.35 26.42,59.53 C20.2
N$39
  Top 0.508: IC3.7 51.55,41.37 52.82,42.64 55.86,42.64 56.43,43.21 R27.1
N$40
  Top 0.508: IC3.6 52.82,40.86 53.7,41.75 56.5,41.75 57.77,43.02 57.77,46.58 57.01,47.34 56.56,47.34 R28.1
N$41
  Top 0.61: CHRG1.C R27.2
N$42
  Top 0.61: STD1.C R28.2
N$43
  Top 0.508: R29.1 56.94,33.12 R30.2 56.94,28.6 56.37,28.04 48.88,28.04 48.37,28.54 48.37,31.72 50.07,33.41 IC3.1
N$44  (via drill 0.35)
  Top 0.406: R31.2 47.54,48.42 48.24,49.12 57.13,49.12 58.91,47.34 58.91,28.67 57.26,27.02 41.64,27.02 39.86,28.8 v39.86,36.4
  Top 0.508: U$3.2 45.32,38.38 v45.3,38.4
  Bottom 0.508: v45.3,38.4 45.3,38.5 44.9,38.9 42.3,38.9 39.86,36.46 v39.86,36.4
N$45
  Top 0.508: U$3.1 46.27,39.77 Q3.1
N$46
  Top 0.508: Q3.3 Q4.3
N$47
  Top 0.508: 44.37,37.86 U$3.3 44.37,38.51 43.93,38.96 42.4,38.96 41.96,39.4 Q4.1
N$48  (via drill 1)
  Top 1.016: v39.9,40.3 40,40.2 40,38.5 41.51,36.99 R32.2
  Bottom 1.016: v39.9,40.3 34.21,45.99 BT2.PWR@1
N$49  (via drill 1)
  Top 0.508: U$3.6 46.27,35.02 | 46.27,35.02 46.27,31.25 C9.- | 46.27,35.02 47.35,35.02 47.74,35.4 47.74,40.2 Q3.2
  Top 0.813: Q3.2 47.97,40.27 v49.4,41.7
  Bottom 0.813: v49.4,41.7 49.4,41.8 57.6,50 94.5,50 96.97,52.47 96.97,57.03 BT2.GND@1
N$50
  Top 1.27: IC4.2 33.26,42.54 D2.A 33.37,43.81 33.32,43.86 33.32,44.42 34.59,45.69 C14.1
NRST
  Top 0.152: S2.2 69.58,37.81 70.5,36.9 73,36.9 73.8,36.1 74.23,36.1 74.47,35.87 COMM_MICRO1.7 | 69.58,39.04 S2.2 | S2.2 69.77,38.48 69.77,42.15 C27.2 | S2.2 70.6,39.31 70.6,40.1 71.2,40.7 76.8,40.7 77.4,41.3 82.5,41.3 85.1,43.9 90.6,43.9 91.2,43.3 91.2,41.4 90.3,40.5 90.3,22.5 87.8,20 87.8,9.7 90.1,7.4 90.1,2.17 89.02,1.09 86.5,1.09 85.09,2.5 JP1.4
NSS_BUS  (via drill 0.35)
  Top 0.152: COMM_MICRO1.20 68.09,30.17 67.3,30.17 64.92,27.78 62.88,27.78 60.99,25.89 60.99,10.4 62.9,8.51 v63.5,8.51
  Bottom 0.152: v63.5,8.51 64.5,8.51 66,7 66,2.7 66.8,1.9 69,1.9 69.95,2.85 JP2.6
OSC_IN
  Top 0.152: 75.47,34.34 COMM_MICRO1.5 75.47,36.34 75,36.8 74.24,36.8 74.04,37 74.04,38.48 U$2.P$2 75.31,39.51 C31.1
OSC_OUT
  Top 0.152: C32.1 76.75,39.45 75.86,40.33 73.86,40.33 73.57,40.05 73.57,39.3 U$2.P$3 72.67,37.8 74.04,36.44 74.66,36.44 75,36.1 75,34.23 74.97,34.2 COMM_MICRO1.6
RELAY_1  (via drill 0.5)
  Top 0.508: v37.4,24.8 37.4,20.92 OK1.7
  Bottom 0.508: v37.4,24.8 37.4,28.4 43.85,34.85 94.52,34.85 95.42,35.75 X7.18
RELAY_2  (via drill 0.5)
  Top 0.508: OK1.5 40.01,24.8 v39.9,24.9
  Bottom 0.508: v39.9,24.9 39.9,29.4 44.6,34.1 94.6,34.1 95.49,33.21 X7.16
RELAY_3  (via drill 0.35)
  Top 0.508: OK2.7 46.05,18.86 v46.5,18.4
  Bottom 0.508: v46.5,18.4 87.9,18.4 91.2,21.7 95.17,21.7 X7.8
RELAY_4  (via drill 0.35)
  Top 0.508: v49.3,17.4 48.59,18.11 OK2.5
  Bottom 0.508: X7.6 91.51,20.51 88.4,17.4 v49.3,17.4
RXDO
  Top 0.152: U3.1 22.7,37.5 28.4,37.5 29.8,36.1 29.8,28.47 28.63,27.3 13.7,27.3 13.13,26.73 A1.34
RXLED
  Top 0.152: RX1.C 27.72,36.18 29,34.9 29,28.9 28.3,28.2 18.8,28.2 18.35,28.64 18.35,29.65 U3.22
SCL_BUS  (via drill 0.35)
  Top 0.152: R17.1 88.75,25.46 87.41,26.8 v84.8,26.8 SJ2.2 | JP2.4 71.3,4.34 71.3,6.3 70.6,7 68.5,7 65.11,10.39 63.51,10.39 62.5,11.4 62.5,25.2 62.77,25.47 v62.93,25.47
  Bottom 0.152: v62.93,25.47 69.86,32.4 82.2,32.4 85.5,29.1 85.5,27.5 v84.8,26.8
SCLK_BUS
  Top 0.152: JP2.5 70,5.64 70,5.01 68.8,3.81 68.8,2.4 68.3,1.9 66.8,1.9 66.4,2.3 66.4,7.1 64.31,9.2 62.75,9.2 61.3,10.64 61.3,25.7 62.99,27.39 65.05,27.39 67.34,29.69 COMM_MICRO1.21
SDA_BUS  (via drill 0.35)
  Top 0.152: R16.1 88.7,30.21 87.3,28.8 v84.8,28.8 SJ1.2 | JP2.3 72.49,6.01 71,7.5 68.6,7.5 65.3,10.8 63.8,10.8 62.9,11.7 62.9,24.5 63.95,25.55 v64,25.5
  Bottom 0.152: v64,25.5 64,26 70,32 81.6,32 v84.8,28.8
SWCLK
  Top 0.152: JP1.1 87.63,5.13 86.5,4 86.5,2.4 87,1.9 88.6,1.9 89.31,2.6 89.31,7.13 87.08,9.35 87.08,20.15 86.23,21 81.7,21 79.31,23.39 COMM_MICRO1.49
SWDIO
  Top 0.152: COMM_MICRO1.46 76.47,20.93 76.8,20.6 86.1,20.6 86.67,20.02 86.67,9.22 89,6.9 89,3 88.54,2.54 88.23,2.54 JP1.2
TEMP_LOAD  (via drill 0.35)
  Top 0.152: COMM_MICRO1.25 70.42,27.69 71.09,28.37 71.73,28.37 72,28.1 v72.6,28.1
  Bottom 0.152: X7.10 95.91,25.59 95,26.5 95,29 94,30 88.5,30 88,29.5 88,26 86,24 83.09,24 82,25.09 82,29.5 81,30.5 77.5,30.5 74.9,27.9 73.4,27.9 73.2,28.1 v72.6,28.1
TEMP_P1  (via drill 0.35)
  Top 0.152: COMM_MICRO1.8 73.97,35.44 73.7,35.7 73.18,35.7 72.9,35.98 v72.9,36.08
  Bottom 0.152: v72.9,36.08 73.2,36.38 73.2,36.4 93.12,36.4 94.8,38.08 94.8,40.1 95.9,41.2 101.1,41.2 102.8,39.5 102.8,16.8 100.63,14.63 99.46,14.63 99.06,15.03 X7.1
TEMP_P2  (via drill 0.35)
  Top 0.152: v71.99,36.08 71.99,35.7 72.22,35.47 72.91,35.47 73.47,34.91 COMM_MICRO1.9
  Bottom 0.152: v71.99,36.08 71.99,36.28 72.51,36.8 92.81,36.8 94.3,38.29 94.3,40.31 95.69,41.7 101.31,41.7 103.3,39.71 103.3,16.8 100.5,14 98.3,14 97.8,14.5 97.8,17.2 98.57,17.97 X7.3
TXDO
  Top 0.152: A1.35 11.86,26.49 13.07,27.7 28.5,27.7 29.41,28.61 29.41,35.95 28.16,37.2 23.39,37.2 23,36.8 23,35 22.6,34.6 19.9,34.6 19.5,34.99 19.5,36.91 U3.5
TXLED
  Top 0.152: TX1.C 25.41,35.1 28.2,35.1 28.6,34.7 28.6,29 28.2,28.6 19.1,28.6 18.95,28.75 U3.23
UART_RX  (via drill 0.35)
  Top 0.152: COMM_MICRO1.17 67.29,31.69 66.9,31.3 66.9,30.3 64.8,28.2 62.3,28.2 v62.1,28 | A1.25 24.56,23.64 25.47,22.73 v34,22.73
  Bottom 0.152: v34,22.73 34.4,23.13 58.03,23.13 61.7,26.8 61.7,27.6 v62.1,28
UART_RX_BUS
  Top 0.152: COMM_MICRO1.15 70.44,33.56 70.44,34.34 68.78,36 61.2,36 60.2,35 60.2,27.6 60.69,27.11 60.69,10.21 63.1,7.8 64.6,7.8 65.9,6.5 65.9,4.18 JP2.10
UART_TX  (via drill 0.35)
  Top 0.152: A1.24 25.83,24.27 26.7,23.4 v33,23.4 | COMM_MICRO1.16 69.97,34.24 68.61,35.6 61.24,35.6 60.64,35 60.64,28.46 v61.1,28
  Bottom 0.152: v61.1,28 61.3,27.8 61.3,26.9 57.92,23.52 33.12,23.52 v33,23.4
UART_TX_BUS
  Top 0.152: JP2.9 64.87,6.83 64.3,7.4 63,7.4 60.39,10.01 60.39,26.91 59.9,27.41 59.9,35.13 60.38,35.61 60.38,35.62 | COMM_MICRO1.14 70.97,34.41 68.98,36.4 61.16,36.4 60.38,35.62 | 60.3,35.54 60.38,35.62
UPS_CURRENT  (via drill 0.35)
  Top 0.152: COMM_MICRO1.10 72.94,33.56 72.94,34.94 72.81,35.07 71.8,35.07 71.08,35.79 v71.08,36.08
  Bottom 0.152: v71.08,36.08 71.08,36.18 72.1,37.2 92.51,37.2 93.8,38.49 93.8,40.51 95.49,42.2 101.41,42.2 103.6,40.01 103.6,16.6 100.6,13.6 97.5,13.6 96.52,14.58 X7.2
USB_D+1
  Top 0.152: X1.D+ 12.38,34.62 13.76,33.24 U3.15
USB_D-1
  Top 0.152: X1.D- 12.58,35.42 14.4,33.59 U3.16
V_LOAD  (via drill 0.35)
  Top 0.152: 68.41,27.19 COMM_MICRO1.26 70.89,27.19 v71.4,27.7
  Bottom 0.152: X7.14 88.17,30.67 87,29.5 87,26 86,25 83.5,25 83,25.5 83,29.91 81.41,31.5 77.09,31.5 74.89,29.3 72.64,29.3 71.89,28.55 71.89,27.99 71.61,27.71 71.41,27.71 v71.4,27.7
V_UPS  (via drill 0.35)
  Top 0.152: COMM_MICRO1.11 72.47,34.51 72.31,34.67 71.53,34.67 70.17,36.03 v70.17,36.08
  Bottom 0.152: v70.17,36.08 71.69,37.6 92.3,37.6 93.3,38.6 93.3,40.72 95.28,42.7 101.52,42.7 103.91,40.31 103.91,16.41 100.69,13.2 96.81,13.2 95.5,14.5 95.5,17.25 96.22,17.97 X7.4

## Text on the board
tNames: Control System - v.1.0 | Leonardo Baptistella 2020